# Allegro board BD95841MUVEVK-101_BRD_REV00_2014-01-06.brd
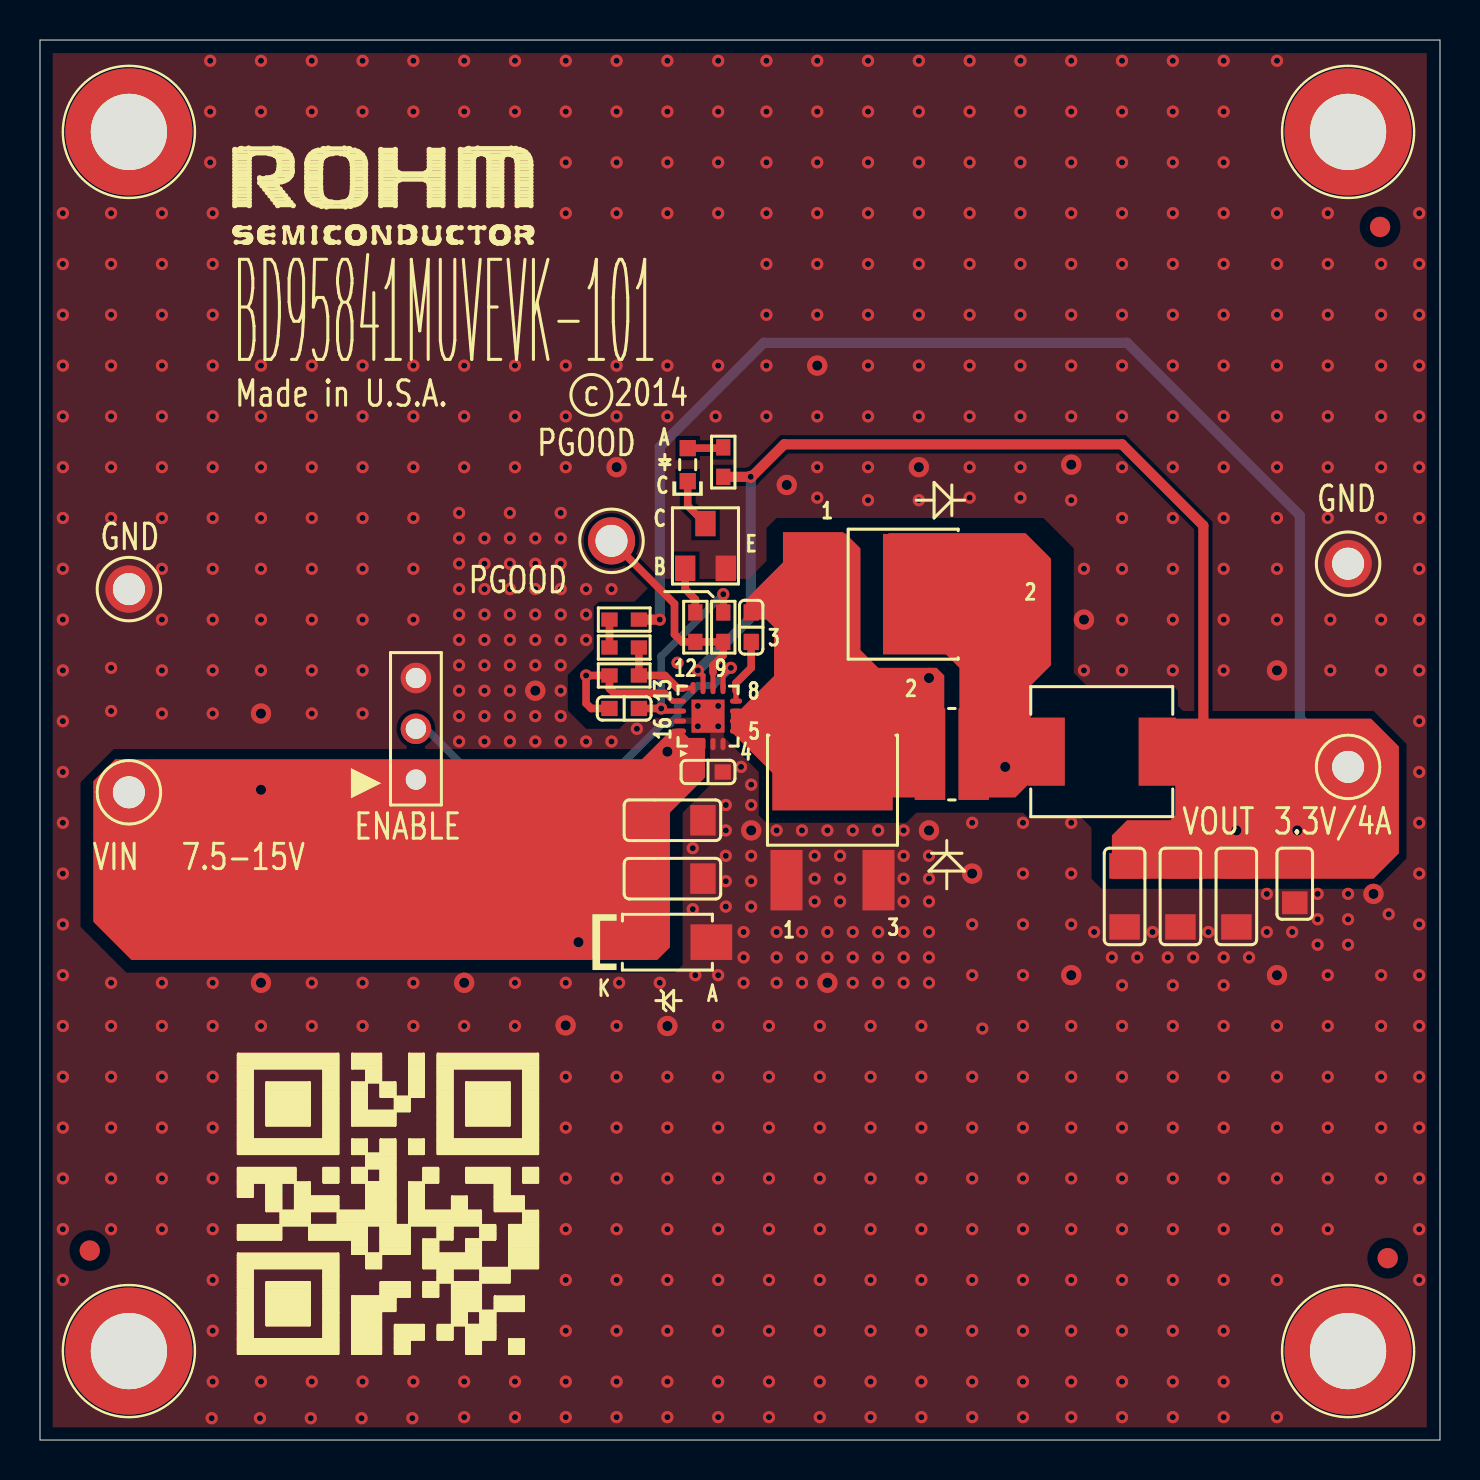
[diagram p0: board, top side]
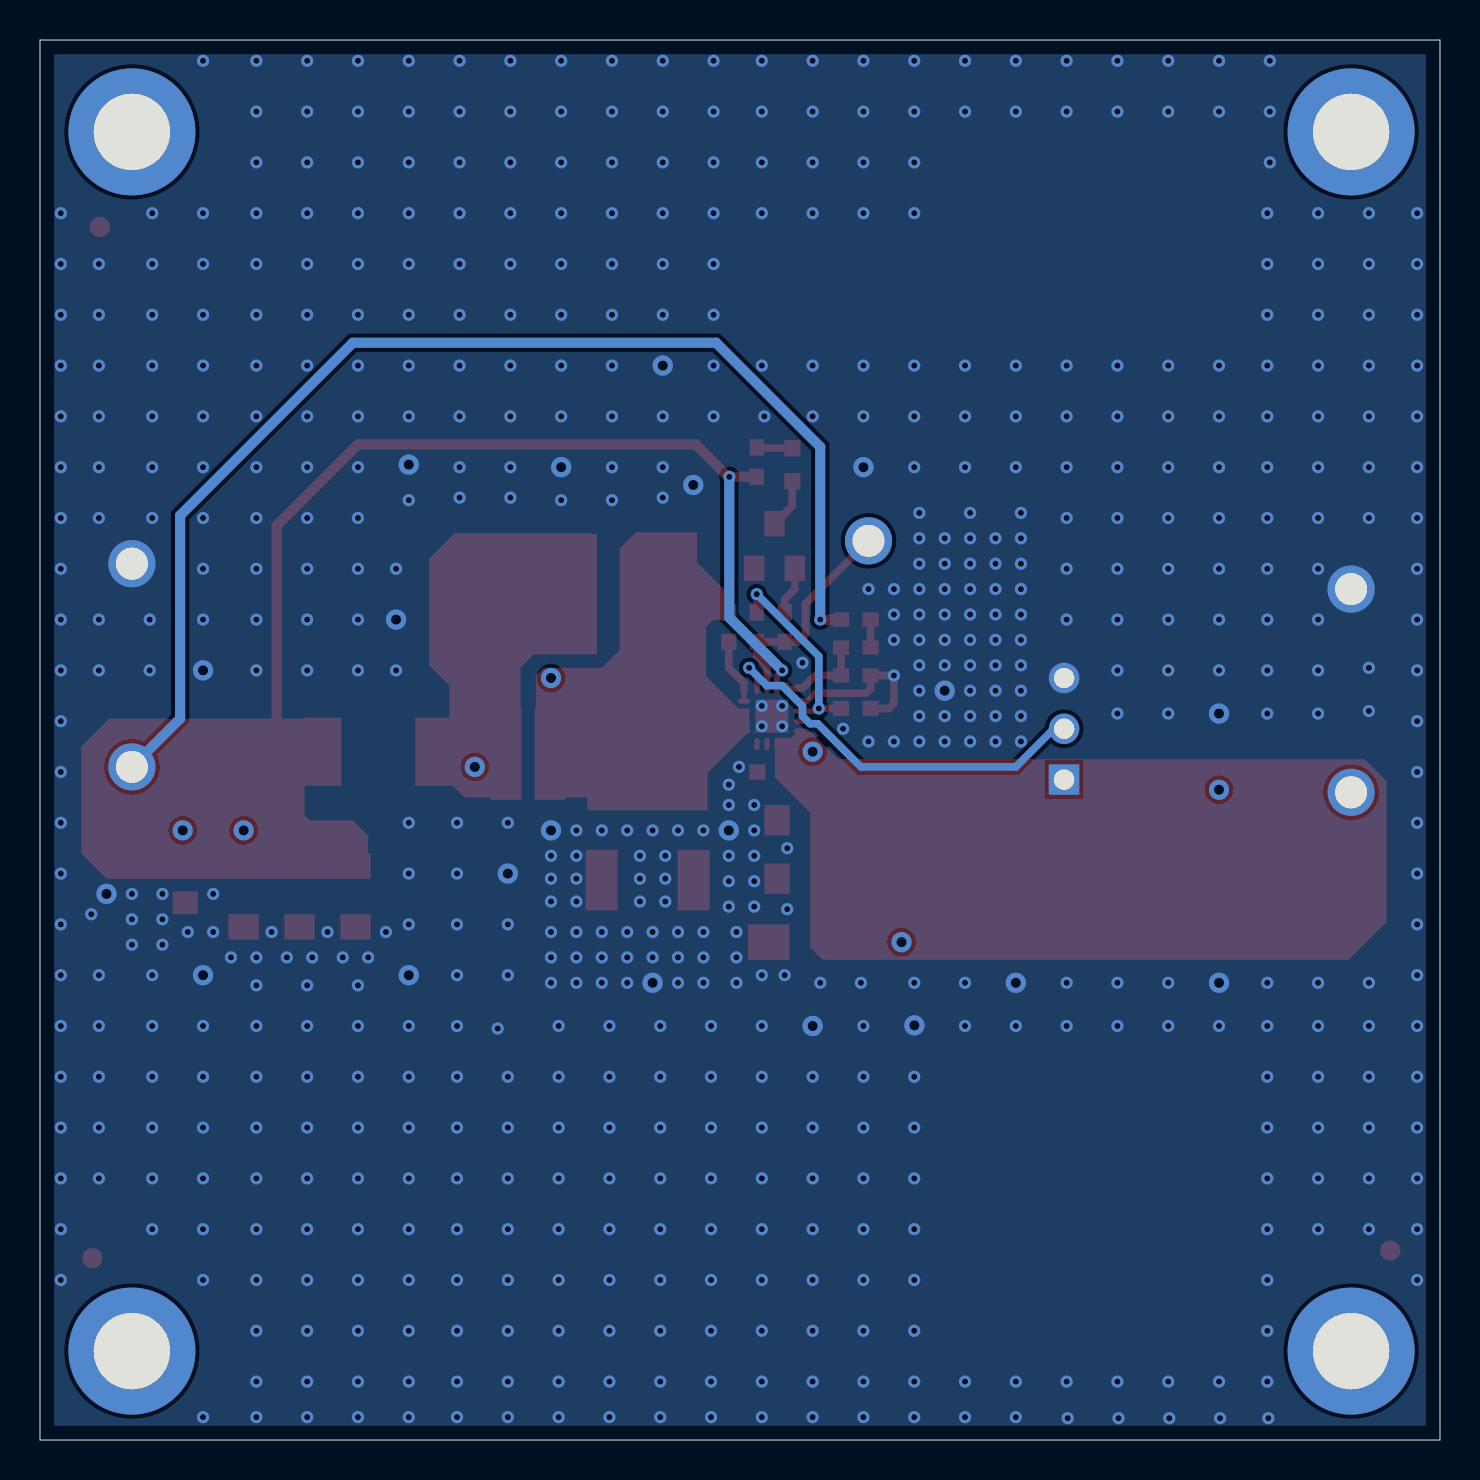
[diagram p1: board, bottom side, seen from below]

Outline 70 x 70 mm; copper layers: TOP, L2_GND, L3_GND, BOTTOM. Coordinates in mm from the lower left corner of the outline.
Outline path: 0,70 0,0 70,0 70,70 0,70

## Placement (name value [footprint] x y rotation side)
C1  10uF  [C1206]  31.62 28.07 0 top
C2  10uF  [C1206]  31.62 30.99 0 top
C3  10000pF  [C0603]  35.56 40.64 90 top
C4  22uF  [C1206]  57.02 27.18 270 top
C5  22uF  [C1206]  59.82 27.18 270 top
C6  0.022uF  [C0603]  29.21 36.58 0 top
C7  Val  [C1206]  54.23 27.18 270 top
C8  Val  [C0805]  62.74 27.81 270 top
C9  0.1uF  [C0603]  33.4 33.4 180 top
CR1  SML-310MTT86  [LED_0603]  32.39 48.77 0 top
D1  SMAJ12A  [DO-214AC]  31.37 24.89 0 top
D2  RB085B-30TL  [CPD]  39.62 31.24 0 top
D3  RB085B-30TL  [CPD]  41.91 42.29 270 top
J1  87224-3  [HDR_THVT_1X3_100]  18.8 33.02 90 top
L1  3.3uH  [SMT_7P1X6P5]  53.09 34.42 0 top
NOREF  -  [unnamed]  65.41 4.45 0 top
NOREF#2  -  [unnamed]  65.41 65.41 0 top
NOREF#3  -  [#2]  70 0 90 top
NOREF#4  -  [unnamed#3]  67 60.65 0 top
NOREF#5  -  [#2]  4.45 4.45 0 top
NOREF#6  -  [#2]  -12.5 -32.37 0 top
NOREF#7  -  [unnamed]  4.45 65.41 0 top
NOREF#8  -  [#2]  0 70 0 top
NOREF#9  -  [#2]  65.41 4.45 0 top
NOREF#10  -  [#2]  4.45 65.41 0 top
NOREF#11  -  [unnamed#3]  2.49 9.47 0 top
NOREF#12  -  [#2]  4.45 4.45 0 top
NOREF#13  -  [unnamed]  4.45 4.45 0 top
NOREF#14  -  [unnamed#3]  67.39 9.09 0 top
Q1  SST2222AT116  [SOT23_BEC]  33.27 44.7 0 top
R2  1.5K  [R0603]  29.21 39.62 0 top
R3  13K  [R0603]  29.21 41.02 180 top
R4  4.7K  [R0603]  29.21 38.23 0 top
R5  100K  [R0603]  34.16 40.64 90 top
R6  1K  [R0603]  32.77 40.64 90 top
R7  30  [R0603]  34.16 48.9 270 top
TP1  TP_63Mil_TH  [TP_TH]  4.45 32.39 0 top
TP2  TP_63Mil_TH  [TP_TH]  65.41 33.66 0 top
TP3  TP_63Mil_TH  [TP_TH]  4.45 42.55 0 top
TP4  TP_63Mil_TH  [TP_TH]  65.41 43.81 0 top
TP5  TP_63Mil_TH  [TP_TH]  28.57 44.96 270 top
U1  BD95841MUV  [VQFN016V3030]  33.4 36.2 0 top
ZX1  0  [SM_180X060]  45.59 34.29 180 top

## Library data of the parts
C1-C9 = CAP_VER
CR1 = LED_0603_GREEN
D1 = DIODE_ZENER_18.2V_400W
D2 D3 = DIODE_RB085B-30TL_30V/10A_DNP
J1 = CONN PCB 3x1_.100"
L1 = IND_2.2uH_8.2A
Q1 = NPN_0
R2 R3 R6 = R_HOZ
R4 R5 R7 = R_VER
TP1-TP5 = TP_63Mil_TH
U1 = IC_BD95841MUV_VQFN016V3030
ZX1 = ZX0603_0

## Footprints (pads in the part's own frame, mm; a bottom-side part is the same pattern mirrored in y, then rotated)
C0603
  rect 0.813x0.762 smd: 1(0.737,0) 2(-0.737,0)
C0805
  rect 1.143x1.27 smd: 1(-0.953,0) 2(0.953,0)
C1206
  rect 1.27x1.524 smd: 1(-1.524,0) 2(1.524,0)
CPD
  rect 1.6x3.023 smd: 1(-2.3,-3.25) 3(2.3,-3.25)
  rect 6.02x6.02 smd: 2(0,3.25)
DO-214AC
  rect 2.083x1.778 smd: 1(-2.2,0) 2(2.2,0)
HDR_THVT_1X3_100
  rect 1.524x1.524 hole 1.016: 1(0,0)
  round 1.524 hole 1.016: 2(2.54,0) 3(5.08,0)
LED_0603
  rect 0.813x0.813 smd: 1(0,-0.825) 2(0,0.825)
R0603
  rect 0.813x0.711 smd: 1(0.737,0) 2(-0.737,0)
SM_180X060
  rect 1.524x4.572 smd: 1(1.092,0) 2(-1.092,0)
SMT_7P1X6P5
  rect 1.854x3.404 smd: 1(-2.775,0) 2(2.775,0)
SOT23_BEC
  rect 1.016x1.27 smd: B(-1.016,-1.118) C(0,1.118) E(1.016,-1.118)
TP_TH
  round 2.362 hole 1.6: 1(0,0)
unnamed
  round 6.35 hole 3.81: (0,0)
unnamed#3
  round 1.016 smd: 1(0,0)
VQFN016V3030
  oval 0.254x0.61 smd: 1(-0.75,-1.4) 2(-0.25,-1.4) 3(0.25,-1.4) 4(0.75,-1.4) 9(0.75,1.4) 10(0.25,1.4) 11(-0.25,1.4) 12(-0.75,1.4)
  oval 0.61x0.254 smd: 5(1.4,-0.75) 6(1.4,-0.25) 7(1.4,0.25) 8(1.4,0.75) 13(-1.4,0.75) 14(-1.4,0.25) 15(-1.4,-0.25) 16(-1.4,-0.75)
  rect 1.651x1.651 smd: 17(0,0)

## Nets
GND: C1.2 C2.2 C4.2 C5.2 C6.2 C7.2 C8.2 C9.2 D1.2(A) D2.1 D2.3 J1.3 Q1.E(2) R4.2 TP3.1 TP4.1 U1.3(PGND1) U1.4(PGND2) U1.13(GND) U1.15(NC) U1.17(THERMAL PAD)
VIN: C1.1 C2.1 C9.1 D1.1(C) J1.1 TP1.1 U1.1(VIN1) U1.2(VIN2) U1.16(VIN3)
BOOT: C3.2 U1.8(BOOT)
EN: J1.2 U1.9(EN)
FB: R2.1 R4.1 U1.12(FB)
FB_R: R2.2 R3.1
PGOOD: R5.2 R6.2 TP5.1 U1.10(PGOOD)
PGOOD_B: Q1.B(1) R6.1
PGOOD_C: CR1.1(C) Q1.C(3)
PGOOD_LED: CR1.2(A) R7.2
SW: C3.1 D2.2 D3.1 D3.3 U1.5(SW1) U1.6(SW2) U1.7(SW3) ZX1.1
SW_ZX: D3.2 L1.1 ZX1.2
VOUT: C4.1 C5.1 C7.1 C8.1 L1.2 R3.2 R7.1 TP2.1 U1.11(VOUT)
VREG: C6.1 R5.1 U1.14(VREG)

Pads without a net: NOREF#4 1; NOREF#11 1; NOREF#14 1

## Via types
v1: diameter 0.61, hole 0.305, TOP to BOTTOM, 626 vias
v2: diameter 1.016, hole 0.508, TOP to BOTTOM, 27 vias

## Routing (per net, layer and track width the routed paths; a pad name or vN(x,y) marks a point on that pad's centre or on a via; arc(x,y) is an arc through that point)
GND: length 39.3
  TOP w0.254: U1.13 31.63,36.95 31.24,37.34
  TOP w0.381: C6.2 27.56,36.58 27.3,36.83 v1(27.3,38.23) R4.2 28.47,37.57 28.7,37.34 31.24,37.34
  L2_GND w0.508: TP3.1 5.46,41.53 ; TP3.1 3.43,41.53 ; TP3.1 3.43,43.56 ; TP3.1 5.46,43.56 ; 18.08,38.82 J1.3 ; J1.3 19.51,38.82 ; J1.3 18.08,37.38 ; J1.3 19.51,37.38 ; TP4.1 66.42,42.8 ; TP4.1 66.42,44.83 ; TP4.1 64.39,44.83 ; TP4.1 64.39,42.8
  L3_GND w0.508: 64.39,44.83 TP4.1 ; TP4.1 66.42,44.83 ; TP4.1 66.42,42.8 ; TP4.1 64.39,42.8 ; 3.43,43.56 TP3.1 ; TP3.1 5.46,43.56 ; TP3.1 5.46,41.53 ; TP3.1 3.43,41.53 ; J1.3 19.51,38.82 ; J1.3 19.51,37.38 ; J1.3 18.08,37.38 ; J1.3 18.08,38.82
  vias: v1(1.14,61.34) v1(1.14,58.8) v1(1.14,56.26) v1(1.14,53.72) v1(1.14,51.18) v1(1.14,48.64) v1(1.14,46.1) v1(1.14,43.56) v1(1.14,41.02) v1(1.14,38.48) v1(1.14,35.94) v1(1.14,33.4) v1(1.14,30.86) v1(1.14,28.32) v1(1.14,25.78) v1(1.14,23.24) v1(1.14,20.7) v1(1.14,18.16) v1(1.14,15.62) v1(1.14,13.08) v1(1.14,10.54) v1(1.14,8) v1(3.56,61.34) v1(3.56,58.8) v1(3.56,56.26) v1(3.56,53.72) v1(3.56,51.18) v1(3.56,48.64) v1(3.56,46.1) v1(3.56,38.61) v1(3.56,36.45) v1(3.56,22.86) v1(3.56,20.7) v1(3.56,18.16) v1(3.56,15.62) v1(3.56,13.08) v1(3.56,10.54) v1(6.1,61.34) v1(6.1,58.8) v1(6.1,56.26) v1(6.1,53.72) v1(6.1,51.18) v1(6.1,48.64) v1(6.1,46.1) v1(6.1,43.56) v1(6.1,41.02) v1(6.1,38.48) v1(6.1,36.32) v1(6.1,22.86) v1(6.1,20.7) v1(6.1,18.16) v1(6.1,15.62) v1(6.1,13.08) v1(6.1,10.54) v1(8.51,68.96) v1(8.51,66.42) v1(8.51,63.88) v1(8.58,1.09) v1(8.64,61.34) v1(8.64,58.8) v1(8.64,56.26) v1(8.64,53.72) v1(8.64,51.18) v1(8.64,48.64) v1(8.64,46.1) v1(8.64,43.56) v1(8.64,41.02) v1(8.64,38.48) v1(8.64,36.32) v1(8.64,22.86) v1(8.64,20.7) v1(8.64,18.16) v1(8.64,15.62) v1(8.64,13.08) v1(8.64,10.54) v1(8.64,8) v1(8.64,5.46) v1(8.64,2.92) v1(11.05,68.96) v1(11.05,66.42) v1(11.05,53.72) v1(11.05,51.18) v1(11.05,48.64) v1(11.05,46.1) v1(11.05,43.56) v1(11.05,41.02) v1(11.05,38.48) v1(11.05,20.7) v1(11.05,2.92) v1(11,1.09) v1(13.59,68.96) v1(13.59,66.42) v1(13.59,53.72) v1(13.59,51.18) v1(13.59,48.64) v1(13.59,46.1) v1(13.59,43.56) v1(13.59,41.02) v1(13.59,38.48) v1(13.59,36.32) v1(13.59,22.86) v1(13.59,20.7) v1(13.59,2.92) v1(13.54,1.09) v1(16.08,1.09) v1(16.13,68.96) v1(16.13,66.42) v1(16.13,53.72) v1(16.13,51.18) v1(16.13,48.64) v1(16.13,46.1) v1(16.13,43.56) v1(16.13,41.02) v1(16.13,38.48) v1(16.13,36.32) v1(16.13,22.86) v1(16.13,20.7) v1(16.13,2.92) v1(18.67,68.96) v1(18.67,66.42) v1(18.67,53.72) v1(18.67,51.18) v1(18.67,48.64) v1(18.67,46.1) v1(18.67,43.56) v1(18.67,41.02) v1(18.67,22.86) v1(18.67,20.7) v1(18.67,2.92) v1(18.62,1.09) v1(20.96,46.35) v1(20.96,45.09) v1(20.96,43.81) v1(20.96,42.55) v1(20.96,41.27) v1(20.96,40.01) v1(20.96,38.73) v1(20.96,37.47) v1(20.96,36.2) v1(20.96,34.92) v1(21.21,68.96) v1(21.21,66.42) v1(21.21,53.72) v1(21.21,51.18) v1(21.21,48.64) v1(21.21,20.7) v1(21.21,2.92) v1(21.21,1.14) v1(22.23,45.09) v1(22.23,43.81) v1(22.23,42.55) v1(22.23,41.27) v1(22.23,40.01) v1(22.23,38.73) v1(22.23,37.47) v1(22.23,36.2) v1(22.23,34.92) v1(23.5,46.35) v1(23.5,45.09) v1(23.5,43.81) v1(23.5,42.55) v1(23.5,41.27) v1(23.5,40.01) v1(23.5,38.73) v1(23.5,37.47) v1(23.5,36.2) v1(23.5,34.92) v1(23.75,68.96) v1(23.75,66.42) v1(23.75,53.72) v1(23.75,51.18) v1(23.75,48.64) v1(23.75,22.86) v1(23.75,20.7) v1(23.75,2.92) v1(23.75,1.14) v1(24.77,45.09) v1(24.77,43.81) v1(24.77,42.55) v1(24.77,41.27) v1(24.77,40.01) v1(24.77,38.73) v1(24.77,36.2) v1(24.77,34.92) v1(26.04,46.35) v1(26.04,45.09) v1(26.04,43.81) v1(26.04,42.55) v1(26.04,41.27) v1(26.04,40.01) v1(26.04,38.73) v1(26.04,37.47) v1(26.04,36.2) v1(26.04,34.92) v1(26.29,68.96) v1(26.29,66.42) v1(26.29,63.88) v1(26.29,61.34) v1(26.29,53.72) v1(26.29,51.18) v1(26.29,48.64) v1(26.29,22.86) v1(26.29,18.16) v1(26.29,15.62) v1(26.29,13.08) v1(26.29,10.54) v1(26.29,8) v1(26.29,5.46) v1(26.29,2.92) v1(26.29,1.14) v1(27.3,42.55) v1(27.3,41.27) v1(27.3,40.01) v1(27.3,34.92) v1(28.57,42.55) v1(28.57,34.92) v1(28.83,68.96) v1(28.83,66.42) v1(28.83,63.88) v1(28.83,61.34) v1(28.83,53.72) v1(28.83,51.18) v1(28.83,20.7) v1(28.83,18.16) v1(28.83,15.62) v1(28.83,13.08) v1(28.83,10.54) v1(28.83,8) v1(28.83,5.46) v1(28.83,2.92) v1(28.83,1.14) v1(28.96,22.86) v1(29.84,35.56) v1(30.99,22.86) v1(31.37,68.96) v1(31.37,66.42) v1(31.37,63.88) v1(31.37,61.34) v1(31.37,53.72) v1(31.37,51.18) v1(31.37,18.16) v1(31.37,15.62) v1(31.37,13.08) v1(31.37,10.54) v1(31.37,8) v1(31.37,5.46) v1(31.37,2.92) v1(31.37,1.14) v1(31.88,38.86) v1(32.64,29.59) v1(32.64,26.54) v1(32.77,23.24) v1(32.89,36.7) v1(32.89,35.69) v1(33.78,51.18) v1(33.91,68.96) v1(33.91,66.42) v1(33.91,63.88) v1(33.91,61.34) v1(33.91,53.72) v1(33.91,36.7) v1(33.91,35.69) v1(33.91,23.24) v1(33.91,20.7) v1(33.91,18.16) v1(33.91,15.62) v1(33.91,13.08) v1(33.91,10.54) v1(33.91,8) v1(33.91,5.46) v1(33.91,2.92) v1(33.91,1.14) v1(34.29,31.75) v1(34.29,30.48) v1(34.29,29.21) v1(34.29,27.94) v1(34.29,26.67) v1(35.05,33.66) v1(35.18,25.4) v1(35.18,24.13) v1(35.18,22.86) v1(35.56,32.77) v1(35.56,31.75) v1(35.56,29.21) v1(35.56,27.94) v1(35.56,26.67) v1(36.32,68.96) v1(36.32,66.42) v1(36.32,63.88) v1(36.32,61.34) v1(36.32,58.8) v1(36.32,56.26) v1(36.32,53.72) v1(36.32,51.18) v1(36.45,20.7) v1(36.45,18.16) v1(36.45,15.62) v1(36.45,13.08) v1(36.45,10.54) v1(36.45,8) v1(36.45,5.46) v1(36.45,2.92) v1(36.45,1.14) v1(36.83,30.48) v1(36.83,25.4) v1(36.83,24.13) v1(36.83,22.86) v1(38.1,30.48) v1(38.1,25.4) v1(38.1,24.13) v1(38.1,22.86) v1(38.73,29.21) v1(38.73,28.07) v1(38.73,26.92) v1(38.86,68.96) v1(38.86,66.42) v1(38.86,63.88) v1(38.86,61.34) v1(38.86,58.8) v1(38.86,56.26) v1(38.86,51.18) v1(38.86,48.64) v1(38.86,47.12) v1(38.99,20.7) v1(38.99,18.16) v1(38.99,15.62) v1(38.99,13.08) v1(38.99,10.54) v1(38.99,8) v1(38.99,5.46) v1(38.99,2.92) v1(38.99,1.14) v1(39.37,30.48) v1(39.37,25.4) v1(39.37,24.13) v1(40.01,29.21) v1(40.01,28.07) v1(40.01,26.92) v1(40.64,30.48) v1(40.64,25.4) v1(40.64,24.13) v1(40.64,22.86) v1(41.4,68.96) v1(41.4,66.42) v1(41.4,63.88) v1(41.4,61.34) v1(41.4,58.8) v1(41.4,56.26) v1(41.4,53.72) v1(41.4,51.18) v1(41.4,48.64) v1(41.4,46.99) v1(41.53,20.7) v1(41.53,18.16) v1(41.53,15.62) v1(41.53,13.08) v1(41.53,10.54) v1(41.53,8) v1(41.53,5.46) v1(41.53,2.92) v1(41.53,1.14) v1(41.91,30.48) v1(41.91,25.4) v1(41.91,24.13) v1(41.91,22.86) v1(43.18,30.48) v1(43.18,29.21) v1(43.18,28.07) v1(43.18,26.92) v1(43.18,25.4) v1(43.18,24.13) v1(43.18,22.86) v1(43.94,68.96) v1(43.94,66.42) v1(43.94,63.88) v1(43.94,61.34) v1(43.94,58.8) v1(43.94,56.26) v1(43.94,53.72) v1(43.94,51.18) v1(43.94,46.99) v1(44.07,20.7) v1(44.07,18.16) v1(44.07,15.62) v1(44.07,13.08) v1(44.07,10.54) v1(44.07,8) v1(44.07,5.46) v1(44.07,2.92) v1(44.07,1.14) v1(44.45,29.21) v1(44.45,28.07) v1(44.45,26.92) v1(44.45,25.4) v1(44.45,24.13) v1(44.45,22.86) v1(46.48,68.96) v1(46.48,66.42) v1(46.48,63.88) v1(46.48,61.34) v1(46.48,58.8) v1(46.48,56.26) v1(46.48,53.72) v1(46.48,51.18) v1(46.48,48.64) v1(46.48,47.12) v1(46.61,30.86) v1(46.61,25.78) v1(46.61,23.24) v1(46.61,18.16) v1(46.61,15.62) v1(46.61,13.08) v1(46.61,10.54) v1(46.61,8) v1(46.61,5.46) v1(46.61,2.92) v1(46.61,1.14) v1(47.12,20.57) v1(49.02,68.96) v1(49.02,66.42) v1(49.02,63.88) v1(49.02,61.34) v1(49.02,58.8) v1(49.02,56.26) v1(49.02,53.72) v1(49.02,51.18) v1(49.02,48.64) v1(49.02,47.12) v1(49.15,30.86) v1(49.15,28.32) v1(49.15,25.78) v1(49.15,23.24) v1(49.15,20.7) v1(49.15,18.16) v1(49.15,15.62) v1(49.15,13.08) v1(49.15,10.54) v1(49.15,8) v1(49.15,5.46) v1(49.15,2.92) v1(49.15,1.14) v1(51.56,68.96) v1(51.56,66.42) v1(51.56,63.88) v1(51.56,61.34) v1(51.56,58.8) v1(51.56,56.26) v1(51.56,53.72) v1(51.56,51.18) v1(51.56,46.99) v1(51.56,30.86) v1(51.56,28.32) v1(51.56,25.78) v1(51.56,20.7) v1(51.56,18.16) v1(51.56,15.62) v1(51.56,13.08) v1(51.56,10.54) v1(51.56,8) v1(51.56,5.46) v1(51.56,2.92) v1(51.56,1.14) v1(52.2,43.56) v1(52.2,38.48) v1(52.7,25.4) v1(53.59,24.13) v1(54.1,68.96) v1(54.1,66.42) v1(54.1,63.88) v1(54.1,61.34) v1(54.1,58.8) v1(54.1,56.26) v1(54.1,53.72) v1(54.1,51.18) v1(54.1,48.64) v1(54.1,46.1) v1(54.1,43.56) v1(54.1,41.02) v1(54.1,38.48) v1(54.1,22.73) v1(54.1,20.7) v1(54.1,18.16) v1(54.1,15.62) v1(54.1,13.08) v1(54.1,10.54) v1(54.1,8) v1(54.1,5.46) v1(54.1,2.92) v1(54.1,1.14) v1(54.86,24.13) v1(55.63,25.4) v1(56.39,24.13) v1(56.64,68.96) v1(56.64,66.42) v1(56.64,63.88) v1(56.64,61.34) v1(56.64,58.8) v1(56.64,56.26) v1(56.64,53.72) v1(56.64,51.18) v1(56.64,48.64) v1(56.64,46.1) v1(56.64,43.56) v1(56.64,41.02) v1(56.64,38.48) v1(56.64,22.73) v1(56.64,20.7) v1(56.64,18.16) v1(56.64,15.62) v1(56.64,13.08) v1(56.64,10.54) v1(56.64,8) v1(56.64,5.46) v1(56.64,2.92) v1(56.64,1.14) v1(57.66,24.13) v1(58.42,25.4) v1(59.18,68.96) v1(59.18,66.42) v1(59.18,63.88) v1(59.18,61.34) v1(59.18,58.8) v1(59.18,56.26) v1(59.18,53.72) v1(59.18,51.18) v1(59.18,48.64) v1(59.18,46.1) v1(59.18,43.56) v1(59.18,41.02) v1(59.18,38.48) v1(59.18,24.13) v1(59.18,22.73) v1(59.18,20.7) v1(59.18,18.16) v1(59.18,15.62) v1(59.18,13.08) v1(59.18,10.54) v1(59.18,8) v1(59.18,5.46) v1(59.18,2.92) v1(59.18,1.14) v1(60.45,24.13) v1(61.34,27.3) v1(61.34,25.4) v1(61.85,68.96) v1(61.85,61.34) v1(61.85,58.8) v1(61.85,56.26) v1(61.85,53.72) v1(61.85,51.18) v1(61.85,48.64) v1(61.85,46.1) v1(61.85,43.56) v1(61.85,41.02) v1(61.85,20.7) v1(61.85,18.16) v1(61.85,15.62) v1(61.85,13.08) v1(61.85,10.54) v1(61.85,8) v1(61.85,1.14) v1(62.61,25.4) v1(63.88,27.3) v1(63.88,26.04) v1(63.88,24.77) v1(64.39,61.34) v1(64.39,58.8) v1(64.39,56.26) v1(64.39,53.72) v1(64.39,51.18) v1(64.39,48.64) v1(64.39,46.1) v1(64.39,23.24) v1(64.39,20.7) v1(64.39,18.16) v1(64.39,15.62) v1(64.39,13.08) v1(64.39,10.54) v1(64.52,41.02) v1(64.52,38.48) v1(65.41,27.3) v1(65.41,26.04) v1(65.41,24.77) v1(67.06,58.8) v1(67.06,56.26) v1(67.06,53.72) v1(67.06,51.18) v1(67.06,48.64) v1(67.06,46.1) v1(67.06,41.02) v1(67.06,38.48) v1(67.06,23.24) v1(67.06,20.7) v1(67.06,18.16) v1(67.06,15.62) v1(67.06,13.08) v1(67.44,26.29) v1(68.96,61.34) v1(68.96,58.8) v1(68.96,56.26) v1(68.96,53.72) v1(68.96,51.18) v1(68.96,48.64) v1(68.96,46.1) v1(68.96,43.56) v1(68.96,41.02) v1(68.96,38.48) v1(68.96,35.94) v1(68.96,33.4) v1(68.96,30.86) v1(68.96,28.32) v1(68.96,25.78) v1(68.96,23.24) v1(68.96,20.7) v1(68.96,18.16) v1(68.96,15.62) v1(68.96,13.08) v1(68.96,10.54) v1(68.96,8) v2(11.05,36.32) v2(11.05,22.86) v2(21.21,22.86) v2(24.77,37.47) v2(26.28,20.73) v2(28.83,48.64) v2(31.37,20.7) v2(35.56,30.48) v2(37.34,47.75) v2(38.86,53.72) v2(39.37,22.86) v2(43.94,48.64) v2(44.45,30.48) v2(46.61,28.32) v2(51.56,48.77) v2(51.56,23.24) v2(52.2,41.02) v2(61.85,38.48) v2(61.85,23.24) v2(66.67,27.3)
VIN:
  vias: v2(11.05,32.51) v2(26.92,24.89) v2(31.37,34.42)
BOOT: length 3.3
  TOP w0.254: U1.8 34.8,37.46
  TOP w0.381: C3.2 35.56,38.61 34.8,37.85 34.8,37.46
EN: length 20.1
  TOP w0.254: v1(34.54,38.61) 34.15,38.22 U1.9
  BOTTOM w0.381: J1.2 19.3,35.56 21.21,33.66 28.96,33.66 31.12,35.81 31.5,35.81 31.88,36.2 31.88,36.7 32.89,37.72 33.66,37.72 v1(34.54,38.61)
FB: length 4.4
  TOP w0.254: U1.12 32.16,37.59
  TOP w0.381: 32.16,37.59 31.87,37.59 31.24,38.23 R4.1 R2.1
FB_R: length 1.4
  TOP w0.381: R3.1 R2.2
PGOOD: length 11.1
  TOP w0.254: U1.10 33.65,38.37
  TOP w0.381: TP5.1 31.72,41.81 31.72,40.28 32.11,39.9 R6.2 R5.2 34.16,39.24 33.65,38.73 33.65,38.37
PGOOD_B: length 2.4
  TOP w0.381: R6.1 32.77,42.04 32.26,42.55 32.26,43.59
PGOOD_C: length 2.5
  TOP w0.381: CR1.1 32.39,46.71 Q1.C
PGOOD_LED: length 1.8
  TOP w0.381: CR1.2 34.12,49.59 R7.2
SW:
  vias: v2(44.45,38.1)
SW_ZX:
  vias: v2(48.26,33.66)
VOUT: length 109.5
  TOP w0.254: v1(32.89,38.48) 33.15,38.22 U1.11
  TOP w0.508: R7.1 v1(35.53,48.16) 35.59,48.16 37.21,49.78 54.1,49.78 58.17,45.72 58.17,35.31 ; R3.2 v1(30.99,41.02)
  BOTTOM w0.508: TP2.1 62.99,36.07 62.99,46.23 54.36,54.86 36.2,54.86 30.99,49.66 v1(30.99,41.02) ; v1(32.89,38.48) 35.53,41.12 v1(35.53,48.16)
  vias: v2(59.82,30.48) v2(62.87,30.48)
VREG: length 10
  TOP w0.254: U1.14 31.19,36.44 v1(31.06,36.58)
  TOP w0.381: v1(31.06,36.58) C6.1 ; R5.1 v1(34.16,42.29)
  BOTTOM w0.381: v1(31.06,36.58) 31.06,39.19 v1(34.16,42.29)

## Copper pours and planes (outline as drawn; the poured copper is in the pictures)
GND on TOP: 0.64,69.34 0.64,0.64 69.34,0.64 69.34,69.34 ; 2 cut-outs
GND on BOTTOM: 0.71,69.29 0.71,0.71 69.29,0.71 69.29,69.29
GND on L2_GND, L3_GND: 0.64,69.34 0.64,0.64 69.34,0.64 69.34,69.34
VIN on TOP (solid shape): 32.21,35.33 32.44,35.1 33.25,35.1 33.25,33.12 31.5,31.37 31.5,24.64 30.86,24 4.57,24 2.67,25.91 2.67,32.94 3.76,34.04 30.1,34.04 31.62,35.56 32.21,35.56
SW on TOP (solid shape): 41.02,44.58 41.02,39.5 41.91,38.61 44.83,38.61 45.21,38.23 45.21,32.13 36.7,32.13 36.7,33.27 34.54,35.43 34.54,36.53 35.03,36.53 36.7,38.2 36.7,40.64 36.32,41.02 35.31,41.02 35.31,42.04 37.21,43.94 37.21,45.34 40.26,45.34
SW_ZX on TOP (solid shape): 50.55,44.07 50.55,38.73 49.53,37.72 49.53,36.07 51.18,36.07 51.18,32.77 49.4,32.77 48.77,32.13 45.97,32.13 45.97,38.61 45.21,39.37 42.42,39.37 42.42,45.34 49.28,45.34
VOUT on TOP (solid shape): 67.94,34.67 67.94,29.34 66.67,28.07 53.59,28.07 53.59,30.23 54.36,30.99 56.52,30.99 56.77,31.24 56.77,32.77 54.99,32.77 54.99,36.07 66.55,36.07

## Text on the board
Ref Des/Silkscreen Top: VIN | GND | 7.5-15V | Made in U.S.A. | ENABLE | PGOOD | c 2014 | VOUT | 3.3V/4A | BD95841MUVEVK-101
L2_GND: L2_GND
L3_GND: L3_GND
PAGE_OUTLINE: REV | DESCRIPTION | REVISIONS | DATE | APPROVED | D | C | B | A | 4 | 3 | 2
DIMENSION: 2.581 | .175
User.5: .1 | .03 | .010 | DECIMAL | UNLESS OTHERWISE | SPECIFIED DIMENSIONS | ARE IN INCHES | TOLERANCES | ANGLE | MACH FINISH | 30 | X | XX | XXX | DESIGNER: | CHECKER: | JOB#: | DATE: | 2014-01-06 | PTHVDC | INITIAL | COMPANY NAME: | PROJECT NAME: | SHEET: | REV. | ROHM SEMICONDUCTOR USA | BD95841MUVEVK-101 | 00
User.18: FAB NUMBER: | FAB DRAWING | NUMBER | 1 OF 2 | 14. Rounding is allowed on 90 degree corners with the size of | 12. Inside corners should be rounded-off | 13. Changes to board geometries and apertures are not | 10. Bow and Twist | 11. Inspection | standard routing bit. | allowed unless they are approved by customer. | 4. Drilling | 5. Finish | 9. Packaging | 8. Cleanliness | 7. Electrical Test | 3. Soldermask | photoimageable soldermask, 003 max. thickness. | Soldermask over bare copper. | Soldermask is allowed in via holes. | Bow and twist to be .007 IN/IN or .090 max according to IPC-A-600D. | NOTES: | 2. Material | 6. Silkscreen | to conduct a thorough review of the artwork and media for | writing (in advance of manufacturing) of any changes, revisions,or | 1. Specifications. | as meaxured by the omega meter 600SMD. | A. All hole diameters are finished sizes. | B. All hole to be +/- .003 from true position unless otherwise specified. | C. All hole diameters to be +/- .003 unless otherwise specified. | D. An NC drill file has been supplied - see drill table. | A. Plate thru with copper .0010 min to .002 max. thickness drill size | dimension apply after plating. | B. Use gold immersion over nickel. | C. Finished boards shall not have nicks, | scratches, voids, exposed copper, poor plating, all misdrilled holes. | manufacturability in the supplier's process compliance to all | A. Boards shall be free of fiber glass dust or any other foreign material. | B. Finished boards must conform to 0.01 MG/IN max NAcL ionic contamination | A. All boards shall be 100% electrically tested for opens/short at 10 volts. | MIL-SPEC boards to be tested at 40 volts. | B. Apply test stamp in non-legend area on solder side of PCB. | C. Test is required on both sides of the board. | Solder mask both sides with (green color) liquid | A. FR406. | B. Color to be opaque. | A. Silkscreen using white non-conductive epoxy or equivalent (both sides). | B. No silkscreen allowed on exposed lands. | C. Silkscreen must be a minimum of 3mm away form fiducial marks. | D. Minimum clearance between silkscreen legend and vias, pads, or holes | to be .005. | E. Silkscreen is allowed in via holes. | There shall be a max of 25 units per package, individually wrapped, | and shipped in cardboard cratons with sufficient surrounding | material to prevend shipping damage. | A.Automatic optical inspection of all layers required. | B.The impedance should be controlled by stackup layer. | gerber and drill data when applicable. | A. Fabricate IAW  IPC600, latest revision. | B. Producibility study - It is the respondsibility  of the supplier | corrections made or recommendations to ensure conformance to | D. This drawing is to be used in conjunction with the provided | E. All notes are "Unless Otherwise Specified." | standards, and of  any specifications that  cannot be met. | applicable specifications. Customer must be advised in
User.31: Layer name | Prepreg | BOTTOM | L3_GND | TOP | L2_GND | L | 1 | TOTAL 62 MILs +/-10% thickness board | a | - | y | 4 | e | r | s | 41.20 | 2.70 | 5.00 | T | ( | m | h | C | i | c | u | l | k | ) | . | D | P | w | 2 oz | t | H | F | o | z | p | V
User.32: FIGURE | SIZE | 12.0 | 20.0 | 40.0 | 63.0 | 150.0 | DRILL CHART: TOP to BOTTOM | ALL UNITS ARE IN MILS | TOLERANCE | +3.0/-10.0 | +3.0/-3.0 | PLATED | QTY | 626 | 27 | 3 | 5 | 4
